# Altium PCB LimeSDR-Micro_mPCIe_1v4.PcbDoc (part 5 of 11)
Units mm, origin at the board's own origin, x right, y up, seen from the top; angles counter-clockwise.
Board outline 50.8 x 29.7 mm, 8 copper layers (Top, L2, L3, L4, L5, L6, L7, Bottom), stack 0.925 mm thick; 664 components, 386 nets, 2358 pads, 843 vias.
Unrouted connection lines stored in the file: 28.
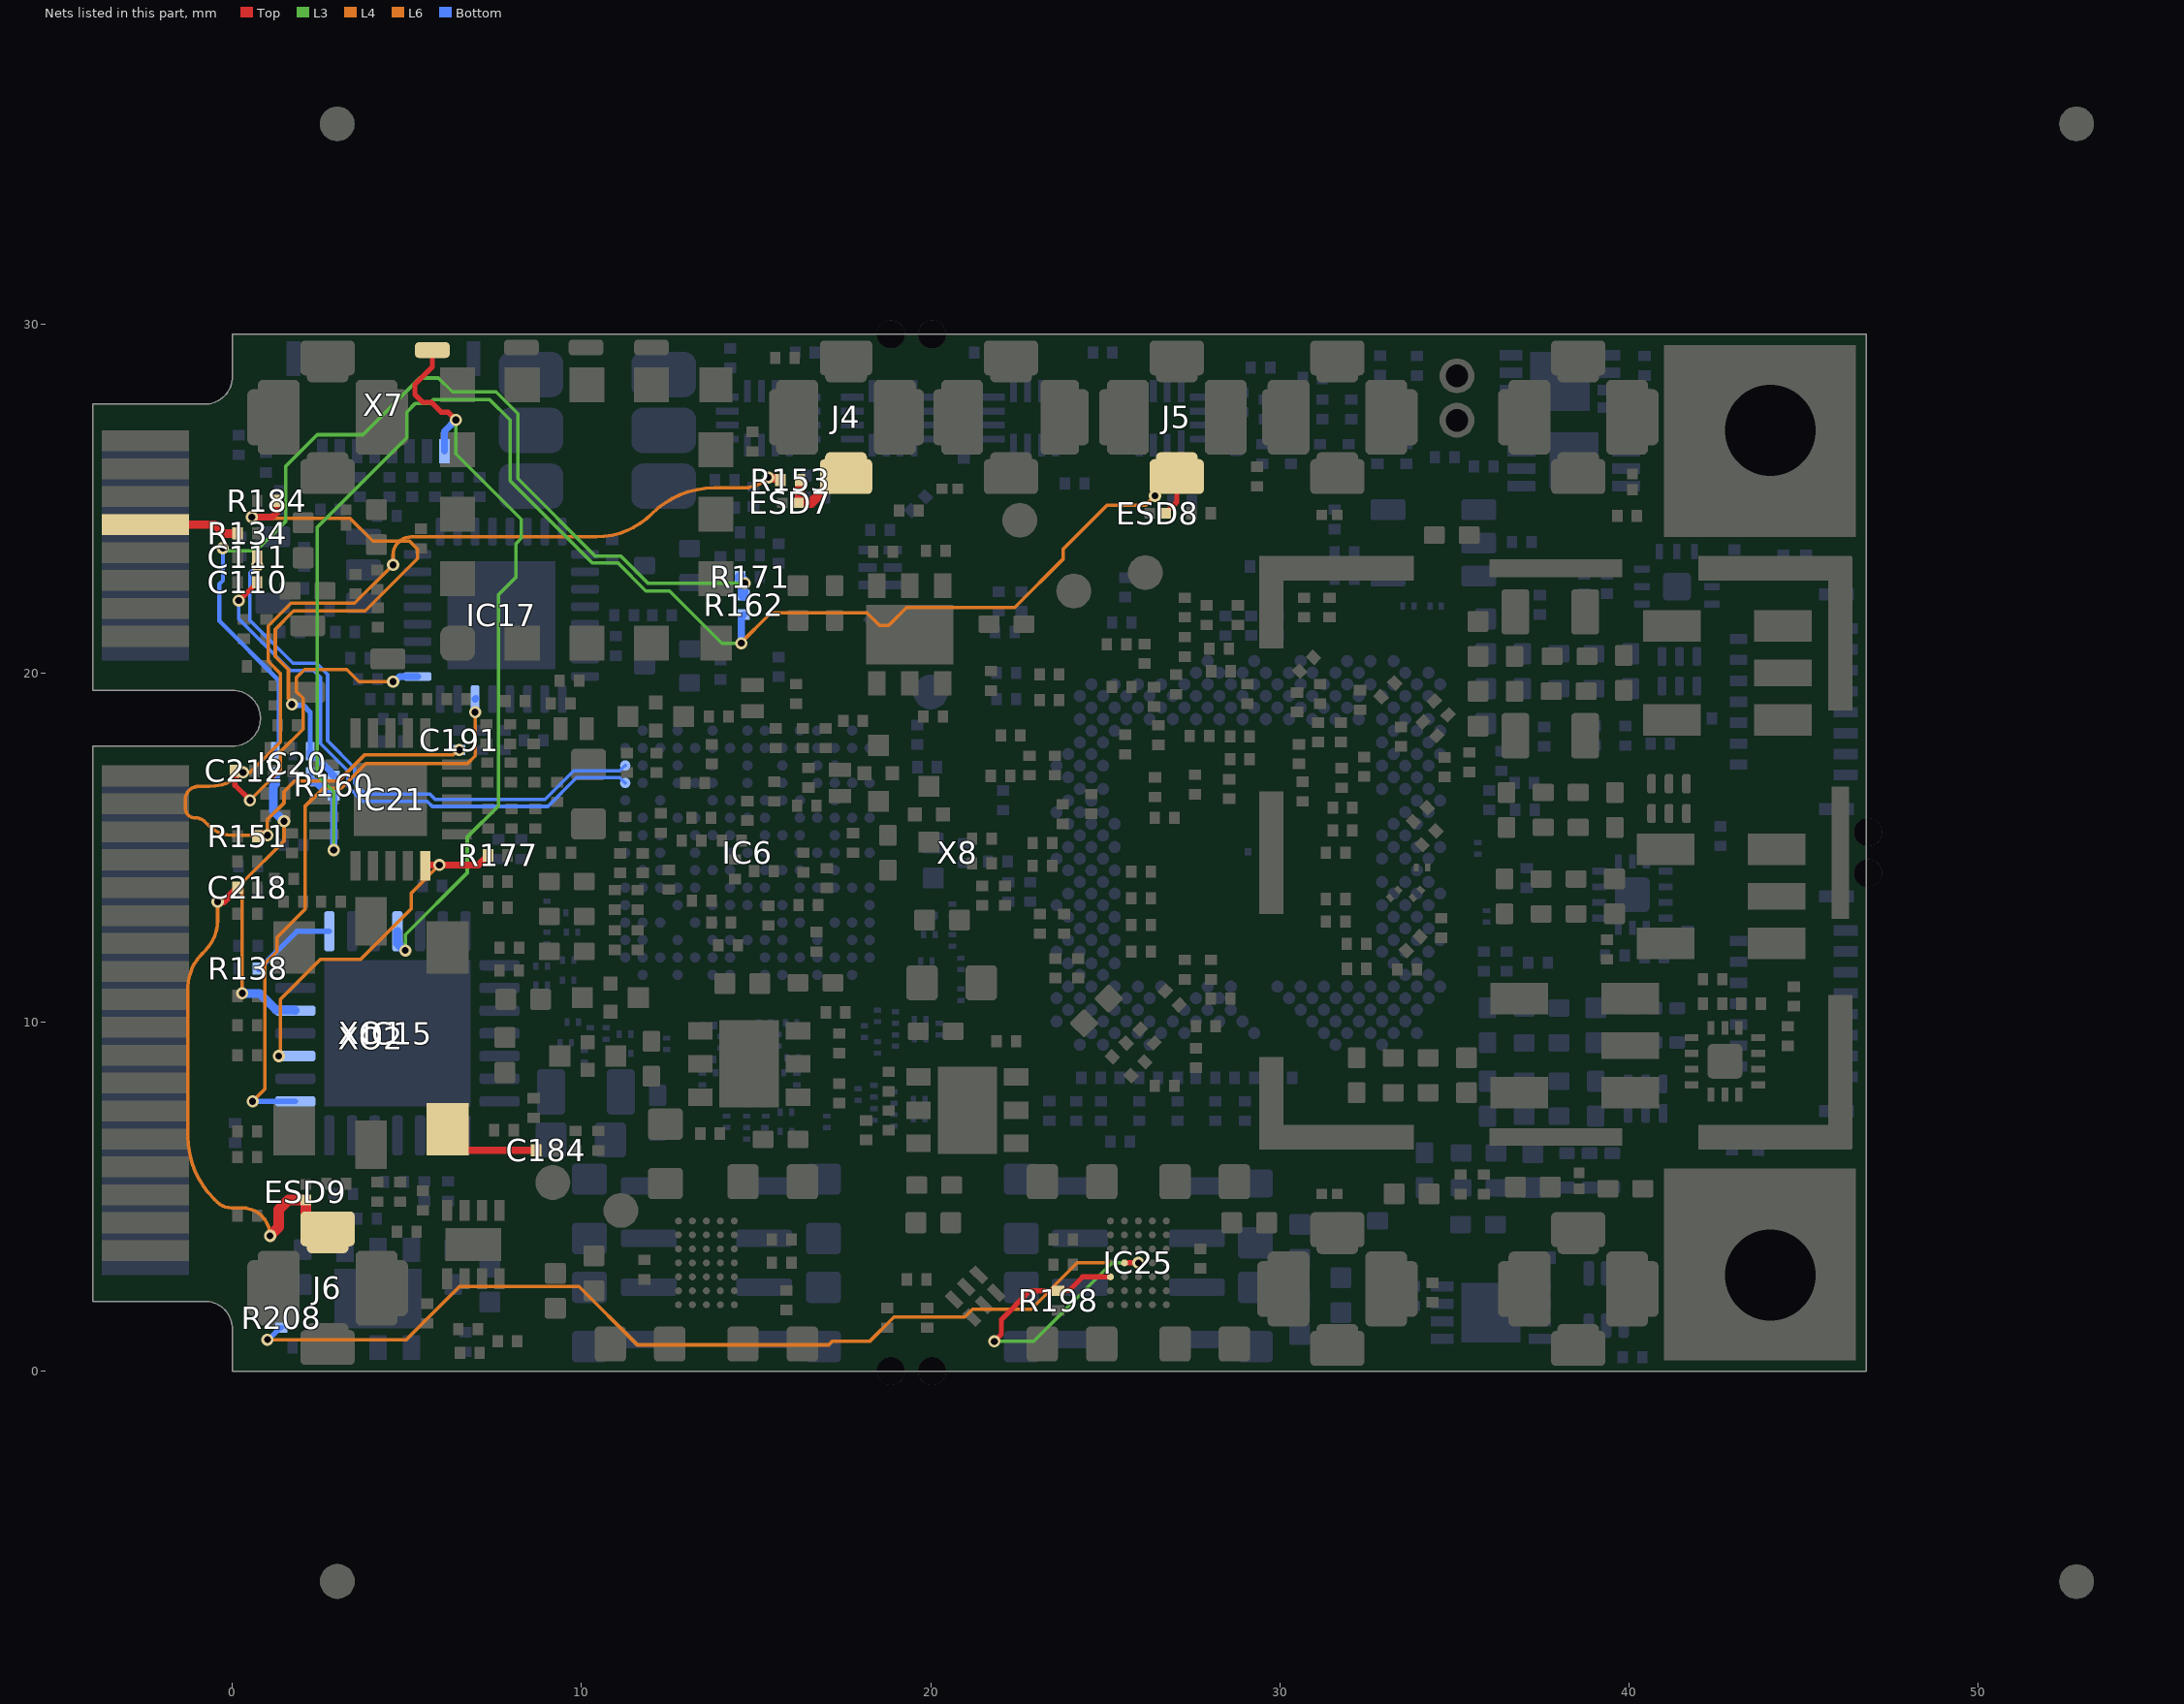
[diagram p9: the nets of this part, all layers, seen from the top]

## Part data (continued)
R83: library part Res_0402, Manufacturer=Yageo, Manufacturer Part Number 1=RC0201FR-075R1L, Supplier Part Number 1=13-RC0201FR-075R1LCT-ND, ComponentLink1Description=https://datasheet.ciiva.com/5924/1563626-5924912.pdf?src-supplier=Farnell, ComponentLink1URL=https://datasheet.ciiva.com/5924/1563626-5924912.pdf?src-supplier=Farnell, ComponentLink2Description=https://datasheet.ciiva.com/22661/1563626-22661319.pdf?src-supplier=Element14, ComponentLink2URL=https://datasheet.ciiva.com/22661/1563626-22661319.pdf?src-supplier=Element14, ComponentLink3Description=https://datasheet.ciiva.com/7672/1563626-7672202.pdf?src-supplier=Element14, ComponentLink3URL=https://datasheet.ciiva.com/7672/1563626-7672202.pdf?src-supplier=Element14, ComponentLink4Description=https://datasheet.ciiva.com/2493/pyu-r-int-thick-7-2493785.pdf?src-supplier=Digi-Key, ComponentLink4URL=https://datasheet.ciiva.com/2493/pyu-r-int-thick-7-2493785.pdf?src-supplier=Digi-Key, ComponentLink5Description=https://datasheet.ciiva.com/2493/pyu-r-int-thick-7-2493786.pdf?src-supplier=Digi-Key, ComponentLink5URL=https://datasheet.ciiva.com/2493/pyu-r-int-thick-7-2493786.pdf?src-supplier=Digi-Key, ComponentLink6Description=https://datasheet.ciiva.com/2493/pyu-r-int-thick-7-2493784.pdf?src-supplier=Digi-Key, ComponentLink6URL=https://datasheet.ciiva.com/2493/pyu-r-int-thick-7-2493784.pdf?src-supplier=Digi-Key, ComponentLink7Description=https://datasheet.octopart.com/RC0201FR-075R1L-Yageo-datasheet-164759695.pdf?src-supplier=Future+Electronics, ComponentLink7URL=https://datasheet.octopart.com/RC0201FR-075R1L-Yageo-datasheet-164759695.pdf?src-supplier=Future+Electronics, ComponentLink8Description=http://www.yageo.com/documents/recent/PYu-RC_Group_51_RoHS_L_9.pdf?src-supplier=Digi-Key, ComponentLink8URL=http://www.yageo.com/documents/recent/PYu-RC_Group_51_RoHS_L_9.pdf?src-supplier=Digi-Key, Part Description="5.1 Ohms ±1% 0.05W, 1/20W Chip Resistor 0201 (0603 Metric) Moisture Resistant Thick Film", Pricing 1="1=0,1, 10=0,036, 50=0,023, 100=0,0194, 500=0,01352, 1000=0,01177, 5000=0,00876 (USD)", RoHS=Yes, Stock 1=59079, Supplier 1=Digi-Key
R91 R92 R93 R94 R95 R96 R97 R98: library part Res_0402, Case Code (Imperial)=1005, Case Code (Metric)=0402, Manufacturer=Yageo, Manufacturer Part Number 1=RC0100FR-0747RL, Max Operating Temperature=125°C, Max Power Dissipation=30mW, Min Operating Temperature=-55°C, Resistance=47R, Supplier Part Number 1=YAG6360CT-ND, Temperature Coefficient=300ppm/°C, Tolerance=1%, ComponentLink1Description=https://datasheet.ciiva.com/5924/1563626-5924912.pdf?src-supplier=Farnell, ComponentLink1URL=https://datasheet.ciiva.com/5924/1563626-5924912.pdf?src-supplier=Farnell, ComponentLink2Description=https://datasheet.ciiva.com/22661/1563626-22661319.pdf?src-supplier=Element14, ComponentLink2URL=https://datasheet.ciiva.com/22661/1563626-22661319.pdf?src-supplier=Element14, ComponentLink3Description=http://www.yageo.com.tw/exep/pages/download/literatures/PYu-R_INT-thick_7.pdf?src-supplier=Digi-Key, ComponentLink3URL=http://www.yageo.com.tw/exep/pages/download/literatures/PYu-R_INT-thick_7.pdf?src-supplier=Digi-Key, Features="Moisture Resistant", Height=0.006inch, Length=0.016inch, Number of Terminations=2, Packaging="Tape and Reel", Part Description="RES 47 OHM 1% 1/32W 01005", Pricing 1="1=0,23, 10=0,12, 50=0,0824, 100=0,0709, 500=0,05204, 1000=0,04609, 5000=0,03606, 10000=0,03298 (USD)", RoHS=Yes, RoHS Compliant=Yes, Series=RC, Stock 1=19541, Supplier 1=Digi-Key, Width=0.008inch
R99: library part Res_0402, Case/Package=0201, Case Code (Metric)=0603, Manufacturer="Stackpole Electronics", Manufacturer Part Number 1=RMCF0201FT2K67, Max Operating Temperature=125°C, Max Power Dissipation=50mW, Min Operating Temperature=-55°C, Resistance=2.67kR, Supplier Part Number 1=RMCF0201FT2K67CT-ND, Temperature Coefficient=200ppm/°C, Tolerance=1%, Case Code (Imperial)=0201, ComponentLink1Description=https://datasheet.ciiva.com/5924/1563626-5924912.pdf?src-supplier=Farnell, ComponentLink1URL=https://datasheet.ciiva.com/5924/1563626-5924912.pdf?src-supplier=Farnell, ComponentLink2Description=https://datasheet.ciiva.com/22661/1563626-22661319.pdf?src-supplier=Element14, ComponentLink2URL=https://datasheet.ciiva.com/22661/1563626-22661319.pdf?src-supplier=Element14, ComponentLink3Description=https://datasheet.ciiva.com/7660/1421516-7660807.pdf?src-supplier=Element14, ComponentLink3URL=https://datasheet.ciiva.com/7660/1421516-7660807.pdf?src-supplier=Element14, ComponentLink4Description=https://datasheet.ciiva.com/46391/1421516-46391339.pdf?src-supplier=Element14, ComponentLink4URL=https://datasheet.ciiva.com/46391/1421516-46391339.pdf?src-supplier=Element14, ComponentLink5Description=https://datasheet.ciiva.com/2467/pyu-r-int-thick-7-2467110.pdf?src-supplier=Digi-Key, ComponentLink5URL=https://datasheet.ciiva.com/2467/pyu-r-int-thick-7-2467110.pdf?src-supplier=Digi-Key, ComponentLink6Description=https://datasheet.ciiva.com/2467/pyu-r-int-thick-7-2467111.pdf?src-supplier=Digi-Key, ComponentLink6URL=https://datasheet.ciiva.com/2467/pyu-r-int-thick-7-2467111.pdf?src-supplier=Digi-Key, ComponentLink7Description=https://datasheet.ciiva.com/2467/pyu-r-int-thick-7-2467109.pdf?src-supplier=Digi-Key, ComponentLink7URL=https://datasheet.ciiva.com/2467/pyu-r-int-thick-7-2467109.pdf?src-supplier=Digi-Key, ComponentLink8Description=https://www.seielect.com/Catalog/SEI-RMCF_RMCP.pdf?src-supplier=Digi-Key, ComponentLink8URL=https://www.seielect.com/Catalog/SEI-RMCF_RMCP.pdf?src-supplier=Digi-Key, ComponentLink9Description=https://www.seielect.com/catalog/SEI-RMCF_RMCP.pdf?src-supplier=Avnet, ComponentLink9URL=https://www.seielect.com/catalog/SEI-RMCF_RMCP.pdf?src-supplier=Avnet, Contact Plating=Tin,Matte, Mount="Surface Mount", Number of Terminations=2, Packaging="Tape and Reel", Part Description="RES 2.67K OHM 1% 1/20W 0201", Pricing 1="1=0,1, 10=0,019, 50=0,0118, 100=0,0098, 500=0,00666, 1000=0,00571, 5000=0,00415 (USD)", Radiation Hardening=No, RoHS=Yes, RoHS Compliant=Yes, Series=RMCF, Stock 1=29000, Supplier 1=Digi-Key
R108: library part Res_0402, Case/Package=0201, Case Code (Metric)=0603, Manufacturer=Yageo, Manufacturer Part Number 1=RC0201FR-0715RL, Max Operating Temperature=125°C, Max Power Dissipation=50mW, Min Operating Temperature=-55°C, Package Quantity=1, Resistance=15R, Resistance Tolerance=1%, Resistor Type="Thick Film", Supplier Part Number 1=311-15.0MCT-ND, Temperature Coefficient=200ppm/°C, Voltage Rating=25V, Case Code (Imperial)=0201, ComponentLink1Description=https://datasheet.ciiva.com/5924/1563626-5924912.pdf?src-supplier=Farnell, ComponentLink1URL=https://datasheet.ciiva.com/5924/1563626-5924912.pdf?src-supplier=Farnell, ComponentLink2Description=https://datasheet.ciiva.com/22661/1563626-22661319.pdf?src-supplier=Element14, ComponentLink2URL=https://datasheet.ciiva.com/22661/1563626-22661319.pdf?src-supplier=Element14, ComponentLink3Description=https://datasheet.ciiva.com/7672/1563626-7672202.pdf?src-supplier=Element14, ComponentLink3URL=https://datasheet.ciiva.com/7672/1563626-7672202.pdf?src-supplier=Element14, ComponentLink4Description=https://datasheet.ciiva.com/2493/pyu-r-int-thick-7-2493785.pdf?src-supplier=Digi-Key, ComponentLink4URL=https://datasheet.ciiva.com/2493/pyu-r-int-thick-7-2493785.pdf?src-supplier=Digi-Key, ComponentLink5Description=https://datasheet.ciiva.com/2493/pyu-r-int-thick-7-2493786.pdf?src-supplier=Digi-Key, ComponentLink5URL=https://datasheet.ciiva.com/2493/pyu-r-int-thick-7-2493786.pdf?src-supplier=Digi-Key, ComponentLink6Description=https://datasheet.ciiva.com/2493/pyu-r-int-thick-7-2493784.pdf?src-supplier=Digi-Key, ComponentLink6URL=https://datasheet.ciiva.com/2493/pyu-r-int-thick-7-2493784.pdf?src-supplier=Digi-Key, Features="Moisture Resistant", Height=0.23mm, Lead Free="Lead Free", Length=0.6mm, Number of Terminations=2, Packaging="Cut Tape", Part Description="15 Ohms ±1% 0.05W, 1/20W Chip Resistor 0201 (0603 Metric) Moisture Resistant Thick Film", Power Rating=50mW, Pricing 1="1=0,10000, 10=0,03700, 100=0,01530, 1000=0,00685, 2500=0,00595, 5000=0,00491 (USD)", RoHS=Yes, RoHS Compliant=Yes, Series=RC, Size Code=0201, Stock 1=379739, Supplier 1=Digi-Key, Termination=SMD/SMT, Tolerance=1%, Width=0.3mm
R134 R137 R142 R179 R190: library part Res_0402, Case/Package=0201, Case Code (Metric)=0603, Manufacturer="Vishay Dale", Manufacturer Part Number 1=CRCW0201330RFKED, Max Operating Temperature=155°C, Max Power Dissipation=50mW, Min Operating Temperature=-55°C, Package Quantity=1, Resistance=330R, Resistor Type="Thick Film", Supplier Part Number 1=541-330AABCT-ND, Temperature Coefficient=100ppm/°C, Tolerance=1%, Voltage Rating=30V, Case Code (Imperial)=0201, ComponentLink1Description=https://datasheet.ciiva.com/8944/crcw0201e3-8944937.pdf?src-supplier=Avnet, ComponentLink1URL=https://datasheet.ciiva.com/8944/crcw0201e3-8944937.pdf?src-supplier=Avnet, ComponentLink2Description=https://datasheet.ciiva.com/2473/crcw0201e3-2473436.pdf?src-supplier=Digi-Key, ComponentLink2URL=https://datasheet.ciiva.com/2473/crcw0201e3-2473436.pdf?src-supplier=Digi-Key, ComponentLink3Description=https://datasheet.ciiva.com/2473/crcw0201e3-2473437.pdf?src-supplier=Digi-Key, ComponentLink3URL=https://datasheet.ciiva.com/2473/crcw0201e3-2473437.pdf?src-supplier=Digi-Key, ComponentLink4Description=https://datasheet.ciiva.com/2473/crcw0201e3-2473438.pdf?src-supplier=Digi-Key, ComponentLink4URL=https://datasheet.ciiva.com/2473/crcw0201e3-2473438.pdf?src-supplier=Digi-Key, ComponentLink5Description=https://datasheet.ciiva.com/16394/dcrcwe3-16394575.pdf?src-supplier=Future+Electronics, ComponentLink5URL=https://datasheet.ciiva.com/16394/dcrcwe3-16394575.pdf?src-supplier=Future+Electronics, Construction=Rectangular, Contact Plating=Tin, Depth=0.3mm, Height=0.011inch, Lead Free="Lead Free", Length=0.6mm, Military Standard=Not, Number of Terminations=2, Packaging="Tape and Reel", Part Description="330 Ohms ±1% 0.05W, 1/20W Chip Resistor 0201 (0603 Metric) Thick Film", Power Rating=50mW, Pricing 1="1=0,27000, 10=0,23000, 100=0,08990, 1000=0,03762, 2500=0,03448, 5000=0,03135 (USD)", Radiation Hardening=No, RoHS=Yes, RoHS Compliant=Yes, Series=CRCW, Size Code=0201, Stock 1=245078, Supplier 1=Digi-Key, Weight=6E-06oz, Width=0.3mm
R164: library part Res_0402, Case/Package=0201, Case Code (Metric)=0603, Manufacturer=Yageo, Manufacturer Part Number 1=RC0201FR-073KL, Max Operating Temperature=125°C, Max Power Dissipation=50mW, Min Operating Temperature=-55°C, Resistance=3kR, Resistor Type="Thick Film", Supplier Part Number 1=YAG2656CT-ND, Temperature Coefficient=200ppm/°C, Tolerance=1%, Case Code (Imperial)=0201, ComponentLink1Description=http://www.yageo.com/documents/recent/PYu-RC_Group_51_RoHS_L_10.pdf?src-supplier=Digi-Key, ComponentLink1URL=http://www.yageo.com/documents/recent/PYu-RC_Group_51_RoHS_L_10.pdf?src-supplier=Digi-Key, ComponentLink2Description=http://www.yageo.com.tw/exep/pages/download/literatures/PYu-R_INT-thick_7.pdf?src-supplier=Digi-Key, ComponentLink2URL=http://www.yageo.com.tw/exep/pages/download/literatures/PYu-R_INT-thick_7.pdf?src-supplier=Digi-Key, ComponentLink3Description=http://www.yageo.com/documents/recent/PYu-RC_Group_51_RoHS_L_9.pdf?src-supplier=Digi-Key, ComponentLink3URL=http://www.yageo.com/documents/recent/PYu-RC_Group_51_RoHS_L_9.pdf?src-supplier=Digi-Key, Features="Moisture Resistant", Height=0.01inch, Length=0.024inch, Number of Terminations=2, Packaging="Tape and Reel", Part Description="3 kOhms ±1% 0.05W, 1/20W Chip Resistor 0201 (0603 Metric) Moisture Resistant Thick Film", Pricing 1="1=0,10000, 10=0,03700, 100=0,01530, 1000=0,00685, 2500=0,00595, 5000=0,00491 (USD)", RoHS=Yes, RoHS Compliant=Yes, Stock 1=269780, Supplier 1=Digi-Key, Width=0.012inch
R165 R207: library part Res_0402, Case/Package=0201, Case Code (Metric)=0603, Manufacturer=Yageo, Manufacturer Part Number 1=RC0201FR-0712K7L, Max Operating Temperature=125°C, Max Power Dissipation=50mW, Min Operating Temperature=-55°C, Package Quantity=1, Resistance=12.7kR, Resistor Type="Thick Film", Supplier Part Number 1=311-12.7KMCT-ND, Temperature Coefficient=200ppm/°C, Tolerance=1%, Case Code (Imperial)=0201, ComponentLink1Description=https://datasheet.ciiva.com/5924/1563626-5924912.pdf?src-supplier=Farnell, ComponentLink1URL=https://datasheet.ciiva.com/5924/1563626-5924912.pdf?src-supplier=Farnell, ComponentLink2Description=https://datasheet.ciiva.com/22661/1563626-22661319.pdf?src-supplier=Element14, ComponentLink2URL=https://datasheet.ciiva.com/22661/1563626-22661319.pdf?src-supplier=Element14, ComponentLink3Description=https://datasheet.ciiva.com/7660/1421516-7660807.pdf?src-supplier=Element14, ComponentLink3URL=https://datasheet.ciiva.com/7660/1421516-7660807.pdf?src-supplier=Element14, ComponentLink4Description=https://datasheet.ciiva.com/46391/1421516-46391339.pdf?src-supplier=Element14, ComponentLink4URL=https://datasheet.ciiva.com/46391/1421516-46391339.pdf?src-supplier=Element14, ComponentLink5Description=https://datasheet.ciiva.com/2467/pyu-r-int-thick-7-2467110.pdf?src-supplier=Digi-Key, ComponentLink5URL=https://datasheet.ciiva.com/2467/pyu-r-int-thick-7-2467110.pdf?src-supplier=Digi-Key, ComponentLink6Description=https://datasheet.ciiva.com/2467/pyu-r-int-thick-7-2467111.pdf?src-supplier=Digi-Key, ComponentLink6URL=https://datasheet.ciiva.com/2467/pyu-r-int-thick-7-2467111.pdf?src-supplier=Digi-Key, ComponentLink7Description=https://datasheet.ciiva.com/2467/pyu-r-int-thick-7-2467109.pdf?src-supplier=Digi-Key, ComponentLink7URL=https://datasheet.ciiva.com/2467/pyu-r-int-thick-7-2467109.pdf?src-supplier=Digi-Key, ComponentLink8Description=https://datasheet.ciiva.com/2493/pyu-r-int-thick-7-2493806.pdf?src-supplier=Digi-Key, ComponentLink8URL=https://datasheet.ciiva.com/2493/pyu-r-int-thick-7-2493806.pdf?src-supplier=Digi-Key, ComponentLink9Description=https://datasheet.ciiva.com/2493/pyu-r-int-thick-7-2493807.pdf?src-supplier=Digi-Key, ComponentLink9URL=https://datasheet.ciiva.com/2493/pyu-r-int-thick-7-2493807.pdf?src-supplier=Digi-Key, ComponentLink10Description=https://datasheet.ciiva.com/2493/pyu-r-int-thick-7-2493805.pdf?src-supplier=Digi-Key, ComponentLink10URL=https://datasheet.ciiva.com/2493/pyu-r-int-thick-7-2493805.pdf?src-supplier=Digi-Key, Features="Moisture Resistant", Height=0.01inch, Length=0.024inch, Number of Terminations=2, Packaging="Tape and Reel", Part Description="12.7 kOhms ±1% 0.05W, 1/20W Chip Resistor 0201 (0603 Metric) Moisture Resistant Thick Film", Pricing 1="1=0,10000, 10=0,03700, 100=0,01500, 1000=0,00672, 2500=0,00583, 5000=0,00482 (USD)", RoHS=Yes, RoHS Compliant=Yes, Series=RC, Stock 1=49027, Supplier 1=Digi-Key, Width=0.012inch
R173: library part Res_0402, Manufacturer=Yageo, Manufacturer Part Number 1=RC0201FR-07470RL, Supplier Part Number 1=YAG2689CT-ND, Voltage Rating (DC)=25V, ComponentLink1Description=https://datasheet.ciiva.com/8944/crcw0201e3-8944937.pdf?src-supplier=Avnet, ComponentLink1URL=https://datasheet.ciiva.com/8944/crcw0201e3-8944937.pdf?src-supplier=Avnet, ComponentLink2Description=https://datasheet.ciiva.com/2473/crcw0201e3-2473436.pdf?src-supplier=Digi-Key, ComponentLink2URL=https://datasheet.ciiva.com/2473/crcw0201e3-2473436.pdf?src-supplier=Digi-Key, ComponentLink3Description=https://datasheet.ciiva.com/2473/crcw0201e3-2473437.pdf?src-supplier=Digi-Key, ComponentLink3URL=https://datasheet.ciiva.com/2473/crcw0201e3-2473437.pdf?src-supplier=Digi-Key, ComponentLink4Description=https://datasheet.ciiva.com/2473/crcw0201e3-2473438.pdf?src-supplier=Digi-Key, ComponentLink4URL=https://datasheet.ciiva.com/2473/crcw0201e3-2473438.pdf?src-supplier=Digi-Key, ComponentLink5Description=https://datasheet.ciiva.com/16394/dcrcwe3-16394575.pdf?src-supplier=Future+Electronics, ComponentLink5URL=https://datasheet.ciiva.com/16394/dcrcwe3-16394575.pdf?src-supplier=Future+Electronics, ComponentLink6Description=https://datasheet.ciiva.com/7672/1563626-7672231.pdf?src-supplier=Element14, ComponentLink6URL=https://datasheet.ciiva.com/7672/1563626-7672231.pdf?src-supplier=Element14, ComponentLink7Description=https://datasheet.ciiva.com/22698/1563626-22698527.pdf?src-supplier=Element14, ComponentLink7URL=https://datasheet.ciiva.com/22698/1563626-22698527.pdf?src-supplier=Element14, Part Description="470 Ohms ±1% 0.05W, 1/20W Chip Resistor 0201 (0603 Metric) Moisture Resistant Thick Film", Pricing 1="1=0,1, 10=0,027, 50=0,0172, 100=0,0143, 500=0,00988, 1000=0,00854, 5000=0,00629 (USD)", RoHS=Yes, Stock 1=296760, Supplier 1=Digi-Key
R189: library part Res_0402, Case/Package=0201, Case Code (Metric)=0603, Manufacturer=Yageo, Manufacturer Part Number 1=RC0201FR-075K6L, Max Operating Temperature=125°C, Max Power Dissipation=50mW, Min Operating Temperature=-55°C, Package Quantity=10000, Resistance=5.6kR, Resistance Tolerance=1%, Resistor Type="Thick Film", Supplier Part Number 1=YAG2346CT-ND, Temperature Coefficient=200ppm/°C, Voltage Rating=25V, Case Code (Imperial)=0201, ComponentLink1Description=https://datasheet.ciiva.com/5924/1563626-5924912.pdf?src-supplier=Farnell, ComponentLink1URL=https://datasheet.ciiva.com/5924/1563626-5924912.pdf?src-supplier=Farnell, ComponentLink2Description=https://datasheet.ciiva.com/22661/1563626-22661319.pdf?src-supplier=Element14, ComponentLink2URL=https://datasheet.ciiva.com/22661/1563626-22661319.pdf?src-supplier=Element14, ComponentLink3Description=https://datasheet.ciiva.com/7660/1421516-7660807.pdf?src-supplier=Element14, ComponentLink3URL=https://datasheet.ciiva.com/7660/1421516-7660807.pdf?src-supplier=Element14, ComponentLink4Description=https://datasheet.ciiva.com/46391/1421516-46391339.pdf?src-supplier=Element14, ComponentLink4URL=https://datasheet.ciiva.com/46391/1421516-46391339.pdf?src-supplier=Element14, ComponentLink5Description=https://datasheet.ciiva.com/2467/pyu-r-int-thick-7-2467110.pdf?src-supplier=Digi-Key, ComponentLink5URL=https://datasheet.ciiva.com/2467/pyu-r-int-thick-7-2467110.pdf?src-supplier=Digi-Key, ComponentLink6Description=https://datasheet.ciiva.com/2467/pyu-r-int-thick-7-2467111.pdf?src-supplier=Digi-Key, ComponentLink6URL=https://datasheet.ciiva.com/2467/pyu-r-int-thick-7-2467111.pdf?src-supplier=Digi-Key, ComponentLink7Description=https://datasheet.ciiva.com/2467/pyu-r-int-thick-7-2467109.pdf?src-supplier=Digi-Key, ComponentLink7URL=https://datasheet.ciiva.com/2467/pyu-r-int-thick-7-2467109.pdf?src-supplier=Digi-Key, ComponentLink8Description=https://datasheet.ciiva.com/22661/1563626-22661325.pdf?src-supplier=Element14, ComponentLink8URL=https://datasheet.ciiva.com/22661/1563626-22661325.pdf?src-supplier=Element14, Features="Moisture Resistant", Height=0.01inch, Length=0.024inch, Number of Terminations=2, Packaging="Tape and Reel", Part Description="5.6 kOhms ±1% 0.05W, 1/20W Chip Resistor 0201 (0603 Metric) Moisture Resistant Thick Film", Power Rating=50mW, Pricing 1="1=0,10000, 10=0,03700, 100=0,01500, 1000=0,00672, 2500=0,00583, 5000=0,00482 (USD)", Reach SVHC Compliant=Yes, RoHS=Yes, RoHS Compliant=Yes, Series=RC, Stock 1=808399, Supplier 1=Digi-Key, Termination=SMD/SMT, Tolerance=1%, Width=0.3mm
R195: library part Res_0402, Case/Package=0201, Case Code (Metric)=0603, Manufacturer="Stackpole Electronics", Manufacturer Part Number 1=RMCF0201FT7K50, Max Operating Temperature=125°C, Max Power Dissipation=50mW, Min Operating Temperature=-55°C, Package Quantity=10000, Resistance=7.5kR, Resistor Type="Thick Film", Supplier Part Number 1=RMCF0201FT7K50CT-ND, Temperature Coefficient=200ppm/°C, Tolerance=1%, Case Code (Imperial)=0201, ComponentLink1Description=https://datasheet.ciiva.com/5924/1563626-5924912.pdf?src-supplier=Farnell, ComponentLink1URL=https://datasheet.ciiva.com/5924/1563626-5924912.pdf?src-supplier=Farnell, ComponentLink2Description=https://datasheet.ciiva.com/22661/1563626-22661319.pdf?src-supplier=Element14, ComponentLink2URL=https://datasheet.ciiva.com/22661/1563626-22661319.pdf?src-supplier=Element14, ComponentLink3Description=https://datasheet.ciiva.com/7660/1421516-7660807.pdf?src-supplier=Element14, ComponentLink3URL=https://datasheet.ciiva.com/7660/1421516-7660807.pdf?src-supplier=Element14, ComponentLink4Description=https://datasheet.ciiva.com/46391/1421516-46391339.pdf?src-supplier=Element14, ComponentLink4URL=https://datasheet.ciiva.com/46391/1421516-46391339.pdf?src-supplier=Element14, ComponentLink5Description=https://datasheet.ciiva.com/2467/pyu-r-int-thick-7-2467110.pdf?src-supplier=Digi-Key, ComponentLink5URL=https://datasheet.ciiva.com/2467/pyu-r-int-thick-7-2467110.pdf?src-supplier=Digi-Key, ComponentLink6Description=https://datasheet.ciiva.com/2467/pyu-r-int-thick-7-2467111.pdf?src-supplier=Digi-Key, ComponentLink6URL=https://datasheet.ciiva.com/2467/pyu-r-int-thick-7-2467111.pdf?src-supplier=Digi-Key, ComponentLink7Description=https://datasheet.ciiva.com/2467/pyu-r-int-thick-7-2467109.pdf?src-supplier=Digi-Key, ComponentLink7URL=https://datasheet.ciiva.com/2467/pyu-r-int-thick-7-2467109.pdf?src-supplier=Digi-Key, ComponentLink8Description=https://www.seielect.com/catalog/SEI-Packaging.pdf?src-supplier=Digi-Key, ComponentLink8URL=https://www.seielect.com/catalog/SEI-Packaging.pdf?src-supplier=Digi-Key, ComponentLink9Description=https://www.seielect.com/Catalog/SEI-RMCF_RMCP.pdf?src-supplier=Digi-Key, ComponentLink9URL=https://www.seielect.com/Catalog/SEI-RMCF_RMCP.pdf?src-supplier=Digi-Key, ComponentLink10Description=https://www.seielect.com/catalog/SEI-RMCF_RMCP.pdf?src-supplier=Avnet, ComponentLink10URL=https://www.seielect.com/catalog/SEI-RMCF_RMCP.pdf?src-supplier=Avnet, ComponentLink11Description=http://www.seielect.com/Catalog/SEI-RMCF_RMCP.pdf?src-supplier=Digi-Key, ComponentLink11URL=http://www.seielect.com/Catalog/SEI-RMCF_RMCP.pdf?src-supplier=Digi-Key, Contact Plating=Tin,Matte, Height=0.009inch, Length=0.024inch, Mount="Surface Mount", Number of Terminations=2, Packaging="Tape and Reel", Part Description="7.5 kOhms ±1% 0.05W, 1/20W Chip Resistor 0201 (0603 Metric) Thick Film", Pricing 1="1=0,10000, 10=0,02400, 100=0,00970, 1000=0,00437, 2500=0,00379, 5000=0,00313 (USD)", Radiation Hardening=No, RoHS=Yes, RoHS Compliant=Yes, Series=RMCF, Stock 1=145930, Supplier 1=Digi-Key, Width=0.012inch
R198: library part Res_0402, Case/Package=0201, Case Code (Metric)=0603, Manufacturer=Yageo, Manufacturer Part Number 1=RC0201FR-0747KL, Max Operating Temperature=125°C, Max Power Dissipation=50mW, Min Operating Temperature=-55°C, Package Quantity=10000, Resistance=47kR, Resistance Tolerance=1%, Resistor Type="Thick Film", Supplier Part Number 1=311-47KMCT-ND, Temperature Coefficient=200ppm/°C, Voltage Rating=25V, Case Code (Imperial)=0201, ComponentLink1Description=http://www.yageo.com/documents/recent/PYu-RC_Group_51_RoHS_L_7.pdf, ComponentLink1URL=http://www.yageo.com/documents/recent/PYu-RC_Group_51_RoHS_L_7.pdf, ComponentLink2Description=https://datasheet.ciiva.com/7672/1563626-7672232.pdf?src-supplier=Element14, ComponentLink2URL=https://datasheet.ciiva.com/7672/1563626-7672232.pdf?src-supplier=Element14, ComponentLink3Description=https://datasheet.ciiva.com/29710/pyu-r-int-thick-7-29710919.pdf?src-supplier=Digi-Key, ComponentLink3URL=https://datasheet.ciiva.com/29710/pyu-r-int-thick-7-29710919.pdf?src-supplier=Digi-Key, ComponentLink4Description=https://datasheet.ciiva.com/29710/pyu-r-int-thick-7-29710920.pdf?src-supplier=Digi-Key, ComponentLink4URL=https://datasheet.ciiva.com/29710/pyu-r-int-thick-7-29710920.pdf?src-supplier=Digi-Key, ComponentLink5Description=https://datasheet.ciiva.com/25647/pyu-r-int-thick-7-25647310.pdf?src-supplier=Digi-Key, ComponentLink5URL=https://datasheet.ciiva.com/25647/pyu-r-int-thick-7-25647310.pdf?src-supplier=Digi-Key, ComponentLink6Description=https://datasheet.ciiva.com/26829/getdatasheetpartid-422496-26829867.pdf?src-supplier=Verical, ComponentLink6URL=https://datasheet.ciiva.com/26829/getdatasheetpartid-422496-26829867.pdf?src-supplier=Verical, ComponentLink7Description=https://datasheet.ciiva.com/8889/pyu-rc0201-51-rohs-l-8-8889065.pdf?src-supplier=Avnet, ComponentLink7URL=https://datasheet.ciiva.com/8889/pyu-rc0201-51-rohs-l-8-8889065.pdf?src-supplier=Avnet, Construction=Rectangular, Contact Plating=Tin,Matte, Depth=0.3mm, Features="Moisture Resistant", Height=0.01inch, Lead Free="Lead Free", Length=0.6mm, Military Standard=Not, Number of Terminations=2, Packaging="Tape and Reel", Part Description="47 kOhms ±1% 0.05W, 1/20W Chip Resistor 0201 (0603 Metric) Moisture Resistant Thick Film", Power Rating=50mW, Pricing 1="1=0,10000, 10=0,03700, 100=0,01500, 1000=0,00672, 2500=0,00583, 5000=0,00482 (USD)", Radiation Hardening=No, RoHS=Yes, RoHS Compliant=Yes, Series=RC, Size Code=0201, Stock 1=684352, Supplier 1=Digi-Key, Termination=SMD/SMT, Tolerance=1%, Weight=6E-06oz, Width=0.3mm
R211: library part Res_0402, Case/Package=0201, Case Code (Metric)=0603, Manufacturer=Yageo, Manufacturer Part Number 1=RC0201FR-0731K6L, Max Operating Temperature=125°C, Max Power Dissipation=50mW, Min Operating Temperature=-55°C, Resistance=31.6kR, Resistor Type="Thick Film", Supplier Part Number 1=YAG2597CT-ND, Temperature Coefficient=200ppm/°C, Tolerance=1%, Case Code (Imperial)=0201, ComponentLink1Description=https://datasheet.ciiva.com/5924/1563626-5924912.pdf?src-supplier=Farnell, ComponentLink1URL=https://datasheet.ciiva.com/5924/1563626-5924912.pdf?src-supplier=Farnell, ComponentLink2Description=https://datasheet.ciiva.com/22661/1563626-22661319.pdf?src-supplier=Element14, ComponentLink2URL=https://datasheet.ciiva.com/22661/1563626-22661319.pdf?src-supplier=Element14, ComponentLink3Description=https://datasheet.ciiva.com/7660/1421516-7660807.pdf?src-supplier=Element14, ComponentLink3URL=https://datasheet.ciiva.com/7660/1421516-7660807.pdf?src-supplier=Element14, ComponentLink4Description=https://datasheet.ciiva.com/46391/1421516-46391339.pdf?src-supplier=Element14, ComponentLink4URL=https://datasheet.ciiva.com/46391/1421516-46391339.pdf?src-supplier=Element14, ComponentLink5Description=https://datasheet.ciiva.com/2467/pyu-r-int-thick-7-2467110.pdf?src-supplier=Digi-Key, ComponentLink5URL=https://datasheet.ciiva.com/2467/pyu-r-int-thick-7-2467110.pdf?src-supplier=Digi-Key, ComponentLink6Description=https://datasheet.ciiva.com/2467/pyu-r-int-thick-7-2467111.pdf?src-supplier=Digi-Key, ComponentLink6URL=https://datasheet.ciiva.com/2467/pyu-r-int-thick-7-2467111.pdf?src-supplier=Digi-Key, ComponentLink7Description=https://datasheet.ciiva.com/2467/pyu-r-int-thick-7-2467109.pdf?src-supplier=Digi-Key, ComponentLink7URL=https://datasheet.ciiva.com/2467/pyu-r-int-thick-7-2467109.pdf?src-supplier=Digi-Key, ComponentLink8Description=http://www.yageo.com/documents/recent/PYu-RC_Group_51_RoHS_L_10.pdf?src-supplier=Digi-Key, ComponentLink8URL=http://www.yageo.com/documents/recent/PYu-RC_Group_51_RoHS_L_10.pdf?src-supplier=Digi-Key, ComponentLink9Description=https://www.yageo.com/upload/media/product/productsearch/datasheet/rchip/PYu-RC_Group_51_RoHS_L_11.pdf?src-supplier=Digi-Key, ComponentLink9URL=https://www.yageo.com/upload/media/product/productsearch/datasheet/rchip/PYu-RC_Group_51_RoHS_L_11.pdf?src-supplier=Digi-Key, ComponentLink10Description=http://www.yageo.com/documents/recent/PYu-RC_Group_51_RoHS_L_9.pdf?src-supplier=Digi-Key, ComponentLink10URL=http://www.yageo.com/documents/recent/PYu-RC_Group_51_RoHS_L_9.pdf?src-supplier=Digi-Key, Features="Moisture Resistant", Height=0.01inch, Length=0.024inch, Number of Terminations=2, Packaging="Tape and Reel", Part Description="31.6 kOhms ±1% 0.05W, 1/20W Chip Resistor 0201 (0603 Metric) Moisture Resistant Thick Film", Pricing 1="1=0,10000, 10=0,03700, 100=0,01500, 1000=0,00672, 2500=0,00583, 5000=0,00482 (USD)", RoHS=Yes, RoHS Compliant=Yes, Stock 1=255391, Supplier 1=Digi-Key, Width=0.012inch
T1 T5 T6: library part 3600BL14M050_balun, Case/Package=0603, Case Code (Metric)=1608, Frequency=3.6GHz, Manufacturer=Johanson, Manufacturer Part Number 1=3600BL14M050T, Max Frequency=3.9GHz, Max Operating Temperature=85°C, Min Frequency=3.3GHz, Min Operating Temperature=-40°C, Package Quantity=1, Resistor Type=Ceramic, Supplier Part Number 1=712-1048-1-ND, Case Code (Imperial)=0603, ComponentLink1Description=https://datasheet.ciiva.com/2788/3600bl14m050-2788852.pdf?src-supplier=Digi-Key, ComponentLink1URL=https://datasheet.ciiva.com/2788/3600bl14m050-2788852.pdf?src-supplier=Digi-Key, ComponentLink2Description=https://datasheet.ciiva.com/22694/1318325-22694755.pdf?src-supplier=Element14, ComponentLink2URL=https://datasheet.ciiva.com/22694/1318325-22694755.pdf?src-supplier=Element14, ComponentLink3Description=https://datasheet.ciiva.com/24072/balun-3600bl14m050-242434-24072532.pdf?src-supplier=Mouser, ComponentLink3URL=https://datasheet.ciiva.com/24072/balun-3600bl14m050-242434-24072532.pdf?src-supplier=Mouser, Depth=0.8mm, Impedance=50R, Insertion Loss=1.2dB, Length=1.6mm, Mount="Surface Mount", Number of Pins=6, Packaging="Tape and Reel", Part Description="Signal Conditioning 3.6GHz 1:1 BALUN", Pricing 1="1=1,19000, 10=1,16900, 25=0,78280, 50=0,69680, 100=0,63840, 250=0,57280, 500=0,56086, 1000=0,40573 (USD)", Radiation Hardening=No, Return Loss=9.5dB, RoHS=Yes, Series=3600, Stock 1=41138, Supplier 1=Digi-Key, Termination=SMD/SMT, Turns Ratio=1:1
T2 T7 T8: library part TC1-1-13M+, Manufacturer=Minicircuits, Manufacturer Part Number 1=TC1-1-13M-45+, Part Description="RF balun; 1:1 ratio; 3 dB bandwidth: 0.3 MHz to 3.5 GHz; 3.8mm x 3.8mm", Supplier 1=Minicircuits, Supplier Part Number 1=TC1-1-13M-45+
T3 T4: library part B0322J5050AHF_balun, Case/Package=0805, Case Code (Metric)=2012, Manufacturer=Anaren, Max Operating Temperature=85°C, Min Operating Temperature=-55°C, Package Quantity=1, Supplier Part Number 1=620-B0322J5050AHF, Case Code (Imperial)=0805, ComponentLink1Description=https://datasheet.ciiva.com/2788/b0322j5050ahf-datasheet-reva-2788996.pdf?src-supplier=Digi-Key, ComponentLink1URL=https://datasheet.ciiva.com/2788/b0322j5050ahf-datasheet-reva-2788996.pdf?src-supplier=Digi-Key, ComponentLink2Description=https://datasheet.ciiva.com/4548/b0322j5050ahf-datasheet-reva-18090-4548378.pdf?src-supplier=Mouser, ComponentLink2URL=https://datasheet.ciiva.com/4548/b0322j5050ahf-datasheet-reva-18090-4548378.pdf?src-supplier=Mouser, ComponentLink3Description=https://datasheet.ciiva.com/2788/b0322j5050ahf-2788997.pdf?src-supplier=Digi-Key, ComponentLink3URL=https://datasheet.ciiva.com/2788/b0322j5050ahf-2788997.pdf?src-supplier=Digi-Key, ComponentLink4Description=https://datasheet.ciiva.com/2788/b0322j5050ahf-2788998.pdf?src-supplier=Digi-Key, ComponentLink4URL=https://datasheet.ciiva.com/2788/b0322j5050ahf-2788998.pdf?src-supplier=Digi-Key, ComponentLink5Description=https://datasheet.ciiva.com/26819/getdatasheetpartid-573228-26819653.pdf?src-supplier=Verical, ComponentLink5URL=https://datasheet.ciiva.com/26819/getdatasheetpartid-573228-26819653.pdf?src-supplier=Verical, Depth=1.29mm, Impedance=50R, Insertion Loss=1.6dB, Length=2.04mm, Manufacturer Part Number 1=B0322J5050AHF, Mount="Surface Mount", Number of Pins=6, Packaging="Tape and Reel", Part Description="Signal Conditioning 300-2200MHz 50 Ohm IL=1.6dB", Pricing 1="1=1,65000, 10=1,02000, 50=1,02000, 100=0,88300, 1000=0,56100, 10000=0,52800 (USD)", RoHS=Yes, RoHS Compliant=Yes, Series=Xinger®, Stock 1=19367, Supplier 1=Mouser, Termination=SMD/SMT, Turns Ratio=1:1
TP1 TP2 TP3 TP7 TP8: "Test Point PCB mount Miniature White"
VT1 VT2: Current - Continuous Drain (Id) @ 25°C="630mA (Ta)", Drive Voltage (Max Rds On,  Min Rds On)="1.8V, 4.5V", Manufacturer="Diodes Incorporated", Manufacturer Part Number 1=DMG1012TQ-7, Operating Temperature="-55°C ~ 150°C (TJ)", Package / Case=SOT-523, Power Dissipation (Max)="280mW (Ta)", Supplier Part Number 1=DMG1012TQ-7DICT-ND, Category="Discrete Semiconductor Products", ComponentLink1Description=https://www.diodes.com/assets/Datasheets/ds31783.pdf, ComponentLink1URL=https://www.diodes.com/assets/Datasheets/ds31783.pdf, FET Feature=-, FET Type=N-Channel, Mounting Type="Surface Mount", Packaging="Cut Tape (CT)", Part Description="N-Channel 20V 630mA (Ta) 280mW (Ta) Surface Mount SOT-523", Part Status=Active, Pricing 1="1=0.47, 10=0.424, 100=0.2375, 500=0.12722, 1000=0.08651 (USD)", Rds On (Max) @ Id, Vgs="400 mOhm @ 600mA, 4.5V", RoHS="RoHS Compliant", Stock 1=3569, Supplier 1=Digi-Key, Supplier Device Package=SOT-523, Technology="MOSFET (Metal Oxide)", Vgs (Max)=±6V, Vgs(th) (Max) @ Id="1V @ 250µA"
X3 X6: library part 5025981593_FPC_connector, Manufacturer=Molex, Supplier Part Number 1=900-5025981593CT-ND, Manufacturer Part Number 1=5025981593, Part Description="15 Position FPC Connector Contacts, Top and Bottom 0.012\" (0.30mm) Surface Mount, Right Angle", Pricing 1="1=1,40000, 10=1,15900, 100=0,96600, 1000=0,77280 (USD)", RoHS=Yes, Stock 1=19758, Supplier 1=Digi-Key
X7: library part 503480-0800_8PIN_FPC_CONN, Manufacturer=Molex, Manufacturer Part Number 1=503480-0800, Supplier Part Number 1=WM1388CT-ND, ComponentLink1Description=https://datasheet.ciiva.com/671/5034800400-sd-671136.pdf?src-supplier=Digi-Key, ComponentLink1URL=https://datasheet.ciiva.com/671/5034800400-sd-671136.pdf?src-supplier=Digi-Key, ComponentLink2Description=https://datasheet.ciiva.com/5751/1631789-5751170.pdf?src-supplier=Farnell, ComponentLink2URL=https://datasheet.ciiva.com/5751/1631789-5751170.pdf?src-supplier=Farnell, ComponentLink3Description=https://datasheet.ciiva.com/10363/5034800800-ffc-fpc-connectors-10363985.pdf?src-supplier=Avnet, ComponentLink3URL=https://datasheet.ciiva.com/10363/5034800800-ffc-fpc-connectors-10363985.pdf?src-supplier=Avnet, ComponentLink4Description=https://datasheet.ciiva.com/5138/5034800800-ffc-fpc-connectors-179547-5138276.pdf?src-supplier=Mouser, ComponentLink4URL=https://datasheet.ciiva.com/5138/5034800800-ffc-fpc-connectors-179547-5138276.pdf?src-supplier=Mouser, ComponentLink5Description=https://datasheet.ciiva.com/26825/getdatasheetpartid-495673-26825585.pdf?src-supplier=Verical, ComponentLink5URL=https://datasheet.ciiva.com/26825/getdatasheetpartid-495673-26825585.pdf?src-supplier=Verical, Part Description="8 Position FFC, FPC Connector Contacts, Top and Bottom 0.020\" (0.50mm) Surface Mount, Right Angle", Pricing 1="1=0,92000, 10=0,76100, 100=0,63420, 1000=0,50736 (USD)", RoHS=Yes, Stock 1=119007, Supplier 1=Digi-Key
X8: library part PCIe_MiniCard_fingers, "PCIe MiniCard full or half size"
XO1: library part RPT7050A, Manufacturer=Rakon, Manufacturer Part Number 1=E6245LF, Part Description="TCXO 30.72MHz, E6245LF", Supplier 1=Rakon, Supplier Part Number 1=E6245LF
XO2: library part TXCO, Manufacturer=Rakon, Manufacturer Part Number 1=E5280LF, Part Description="TCXO 30.72MHz, E5280LF", Supplier 1=Rakon, Supplier Part Number 1=E5280LF

## Free pads (board coordinates)
  round 0.8 hole 0.8 unplated: 0(18.863,0) 0(18.863,29.7) 0(20.038,0) 0(20.038,29.7) 0(46.85,14.262) 0(46.85,15.438)
  rrect50% 1x0.45 smd paste-1 mask+0.05: 2(5.725,29.25) 2(8.275,29.325) 2(10.125,29.325) 2(12,29.325)

## Via types
v1: diameter 0.35, hole 0.2, Top to Bottom, tented both sides, 684 vias
v2: diameter 0.35, hole 0.2, L5 to Bottom, tented both sides, 117 vias
v3: diameter 0.4, hole 0.2, Top to Bottom, tented both sides, 30 vias
v4: diameter 0.5, hole 0.2, Top to Bottom, tented both sides, 12 vias

## Nets (pads, with @x,y where several pads share a name; then routed paths per layer and width w, separated by ;. In a path a pad name is that pad's centre, name@x,y a point inside that pad or via, vN(x,y) a via of type N, cw(c..) or ccw(c..) an arc to the next point about the centre after c; other vN are vias at no path point)
ADF_MUXOUT: IC15.24 IC21.15 R177.1 | length 10.3
  Top w0.2: IC21.15@5.525,14.475 IC21.15@5.525,14.5 ; IC21.15@5.575,14.775 5.525,14.725 IC21.15@5.525,14.5 ; R177.1@7.32,14.775 7.045,14.5 v1(5.925,14.5) IC21.15@5.525,14.5
  L4 w0.1: v1(1.325,9.025) 1.373,9.073 1.373,10.648 2.525,11.8 3.675,11.8 5.125,13.25 5.125,13.7 v1(5.925,14.5)
ADF_REF_IN: C218.2 ESD9.1 J6.1 | length 14.4
  Top w0.2: v1(-0.425,13.45) -0.255,13.45 0.07,13.775 0.095,13.775 0.145,13.825 C218.2@0.145,13.85
  Top w0.3: v1(1.075,3.875) 1.325,4.125 1.325,4.625 1.6,4.9 ESD9.1@2.1,4.9 J6.1@2.1,4.4 ; J6.1@2.525,4.275 J6.1@2.725,4.075
  L6 w0.1: -0.887,11.938 ccw(c0.053,11) -1.275,11 -1.275,6.727 ccw(c1.265,6.727) -0.531,4.931 -0.45,4.85 ccw(c-0.028,5.272) -0.028,4.675 0.275,4.675 cw(c0.275,3.875) v1(1.075,3.875) ; -0.886,11.939 -0.796,12.029 ccw(c-1.692,12.925) -0.425,12.925 v1(-0.425,13.45)
ADF_RF_IN: C212.1 IC17.1 | length 9
  Top w0.15: C212.1@0.07,17.2 0.07,16.78 v1(0.5,16.35)
  L6 w0.1: v1(0.5,16.35) 1.375,17.225 1.375,17.742 2.025,18.392 2.025,19.275 1.825,19.475 1.825,19.86 2.065,20.1 3.275,20.1 3.625,19.75 v2@4.55,19.75
  Bottom w0.2: v2@4.55,19.75 v2(4.6,19.75) 4.641,19.75 4.786,19.895 5.295,19.895 IC17.1@5.3,19.9
BOM_VER0: IC15.1 R138.1 | length 2.5
  Bottom w0.15: R138.1@0.752,11.508 1.844,12.6 IC15.1@2.775,12.6
C1_N: C111.2 IC6.N1 | length 16.6
  Top w0.3: v1(0.705,23.075) C111.2@0.705,23.325
  Bottom w0.1: v1(0.705,23.075) 0.5,22.87 0.5,21.508 1.733,20.275 2.408,20.275 2.725,19.958 2.725,18.058 3.5,17.283 3.5,16.833 3.808,16.525 5.658,16.525 5.808,16.375 8.95,16.375 9.775,17.2 11.092,17.2 11.242,17.35 IC6.N1@11.251,17.35
C1_P: C110.2 IC6.M1 | length 16.4
  Top w0.15: v1(0.175,22.075) 0.192,22.075 0.617,22.5 0.63,22.5 0.705,22.575 C110.2@0.705,22.6
  Bottom w0.1: v1(0.175,22.075) 0.175,21.55 1.65,20.075 2.325,20.075 2.525,19.875 2.525,17.975 3.3,17.2 3.3,16.75 3.725,16.325 5.575,16.325 5.725,16.175 9.033,16.175 9.858,17 11.092,17 11.242,16.85 IC6.M1@11.251,16.85
CLK_IN: C191.2 R151.1 R153.2 | length 33.5
  Top w0.25: v1@15.35,25.575 R153.2@15.695,25.575
  Top w0.3: R151.1@0.702,15.347 0.702,15.348 0.998,15.348 v1(1,15.35)
  L4 w0.1: v1(4.6,23.1) 4.6,23.375 cw(c5.125,23.375) 5.125,23.9 10.422,23.9 ccw(c10.422,26.14) 11.098,24.004 ccw(c10.422,26.14) 12.005,24.555 ccw(c10.422,26.14) 12.006,24.556 cw(c13.802,22.76) 13.802,25.3 14.626,25.3 ccw(c14.626,26.324) v1(15.35,25.6)
  L6 w0.1: v1(4.6,23.1) 3.5,22 1.675,22 1.025,21.35 1.025,20.333 1.375,19.983 1.375,18.025 0.825,17.475 0.5,17.15 v2(0.3,17.15) cw(c-0.666,18.116) -0.666,16.75 -0.975,16.75 ccw(c-0.975,16.375) -1.35,16.375 -1.35,16.125 ccw(c-1.075,16.125) -1.075,15.85 cw(c-1.075,15.428) -0.776,15.726 -0.675,15.625 ccw(c-0.011,16.289) -0.011,15.35 v1(1,15.35) 1,15.8 1.475,16.275 1.475,16.6 1.775,16.9 3.03,16.9 3.78,17.65 6.316,17.65 6.461,17.795 v2(6.5,17.795)
CLK_IN_EXT: ESD7.1 J4.1 R153.1 | length 2.4
  Top w0.3: ESD7.1@16.2,24.875 ESD7.1@16.205,24.875 ; R153.1@16.255,25.525 16.255,24.93 16.205,24.88 ESD7.1@16.205,24.875 ; J4.1@17.575,25.625 17.325,25.625 16.575,24.875 ESD7.1@16.205,24.875
CLK_REQUEST#: R134.1 X8.7 | length 2.7
  Top w0.25: X8.7@-2.5,24.25 -0.505,24.249 -0.255,23.999 R134.1@0.145,23.999
CLK_XO: C184.2 XO1.4 XO2.3 | length 3.3
  Top w0.2: XO1.4@6.479,7.25 XO1.4@6.164,6.935 6.164,6.825 6.664,6.325 C184.2@8.695,6.325
EN_REG: IC25.C5 IC25.D3 IC25.D4 R198.2 R208.2 | length 37.6
  Top w0.1: IC25.D4@25.515,3.1 IC25.D4@25.55,3.1
  Top w0.15: v1(21.825,0.85) 22.025,1.05 22.025,1.475 22.85,2.3 R198.2@23.65,2.3 23.662,2.312 23.962,2.312 24.35,2.7 IC25.C5@25.15,2.7 ; IC25.D4@25.55,3.1 v1(25.95,3.1)
  L3 w0.1: v1(21.825,0.85) 22.95,0.85 25.2,3.1 v1(25.95,3.1)
  L6 w0.1: v1(1,0.9) 4.975,0.9 6.5,2.425 9.925,2.425 11.6,0.75 17.075,0.75 17.175,0.85 18.25,0.85 18.95,1.55 20.975,1.55 21.2,1.775 22.875,1.775 24.2,3.1 v1(25.95,3.1)
  Bottom w0.15: v1(1,0.9) 1.03,0.9 1.375,1.245 R208.2@1.4,1.245
EXP_GPB7: IC15.4 pad.2@5.725,29.25 X7.8 | length 22
  Top w0.15: pad.2@5.725,29.25 5.725,28.77 5.225,28.27 5.225,27.98 5.451,27.754 5.698,27.754 5.977,27.475 6.175,27.475 v1(6.4,27.25)
  L3 w0.1: v1(4.95,12.05) 4.95,12.5 6.725,14.275 6.725,15.3 7.625,16.2 7.625,22.25 8.125,22.75 8.125,23.71 8.275,23.86 8.275,24.4 6.4,26.275 v1(6.4,27.25)
  Bottom w0.2: X7.8@6.075,26.35 6.075,26.925 v1(6.4,27.25)
  Bottom w0.25: IC15.4@4.725,12.6 4.725,12.25 v1@4.925,12.05
EXT_CLK_CTRL: IC15.22 IC17.30 | length 17.1
  L6 w0.1: v1(0.575,7.725) 0.93,8.08 0.93,11.676 1.275,12.021 1.275,12.425 2.075,13.225 2.075,16.175 2.6,16.7 3.112,16.7 3.812,17.4 6.725,17.4 6.95,17.625 v2(6.95,18.875)
  Bottom w0.15: v1(0.575,7.725) IC15.22@1.8,7.725
  Bottom w0.2: IC17.30@6.95,19.25 IC17.30@6.975,19.275
EXT_PPS: ESD8.1 IC20.4 J5.1 R160.1 R162.1 | length 46.3
  Top w0.15: ESD8.1@26.725,24.575 26.73,24.575 26.805,24.65 26.805,24.655 27.05,24.9 J5.1@27.05,25.625 J5.1@27.05,25.725
  L3 w0.1: v1(2.9,14.925) 2.9,16.6 2.425,17.075 2.425,24.175 5,26.75 5,27.485 5.24,27.725 5.635,27.725 5.743,27.834 7.364,27.834 7.95,27.247 7.95,25.508 10.308,23.15 11.042,23.15 11.842,22.35 12.525,22.35 14.023,20.852 v1(14.577,20.852)
  L6 w0.1: v1@14.527,20.827 15.425,21.725 18.175,21.725 18.534,21.366 18.801,21.366 19.31,21.875 22.405,21.875 23.8,23.27 23.8,23.553 25.047,24.8 26.15,24.8 v1(26.425,25.075)
  Bottom w0.2: IC20.4@2.225,17.037 2.225,16.9 2.25,16.875 2.388,16.875 2.718,16.545 2.85,16.545 R160.1@2.9,16.495 v1(2.9,14.925) ; v1(14.577,20.852) 14.577,21.597 R162.1@14.65,21.67
EXT_PPS_IN: IC20.1 R162.2 R171.2 | length 28.7
  L3 w0.1: v1@-0.3,23.5 0.675,23.5 1.529,24.354 1.529,25.929 2.425,26.825 3.741,26.825 5.366,28.45 5.9,28.45 6.3,28.05 7.55,28.05 8.175,27.425 8.175,25.565 10.39,23.35 11.125,23.35 11.9,22.575 v1(14.675,22.575)
  Bottom w0.12: v1(-0.275,23.575) -0.275,22.65 -0.38,22.545 -0.38,21.491 1.33,19.781 1.33,18.005 1.225,17.9 IC20.1@1.225,17.763
  Bottom w0.3: R171.2@14.545,22.75 14.545,22.725 14.625,22.645 14.625,22.23 R162.2@14.65,22.23
EXT_PPS_OUT: IC20.3 R160.2 R184.1 | length 16.5
  Top w0.2: v1(0.55,24.464) 1.139,24.464 1.265,24.59 R184.1@1.265,24.925
  L6 w0.1: v1(0.55,24.464) 0.589,24.425 3.375,24.425 4.025,23.775 5.071,23.775 5.3,23.546 5.3,23.275 3.8,21.775 1.75,21.775 1.225,21.25 1.225,20.475 1.6,20.1 1.6,19.268 1.7,19.168 v2(1.7,19.1)
  Bottom w0.15: v2@1.775,19.075 2.025,19.075 2.225,18.875 IC20.3@2.225,17.763
  Bottom w0.2: IC20.3@2.225,17.763 2.225,17.625 2.25,17.6 2.388,17.6 2.825,17.163 2.825,17.105 2.875,17.055 R160.2@2.9,17.055
EXT_PPS_SEL: IC15.26 IC20.6 | length 8.6
  L6 w0.1: v2(0.278,10.822) 0.278,13.988 1.475,15.185 v2(1.475,15.75)
  Bottom w0.25: v2(0.278,10.822) 0.771,10.822 1.242,10.35 1.775,10.35 IC15.26@1.8,10.325 ; IC20.6@1.225,17.037 1.225,16.815 1.175,16.765 1.175,16.05 v2(1.475,15.75)